# Altium PCB PCB1.PcbDoc
Units mil, origin at the board's own origin, x right, y up, seen from the top; angles counter-clockwise.
Board outline 935 x 1770 mil, 2 copper layers (Top Layer, Bottom Layer); 31 components, 15 nets, 141 pads, 79 vias.
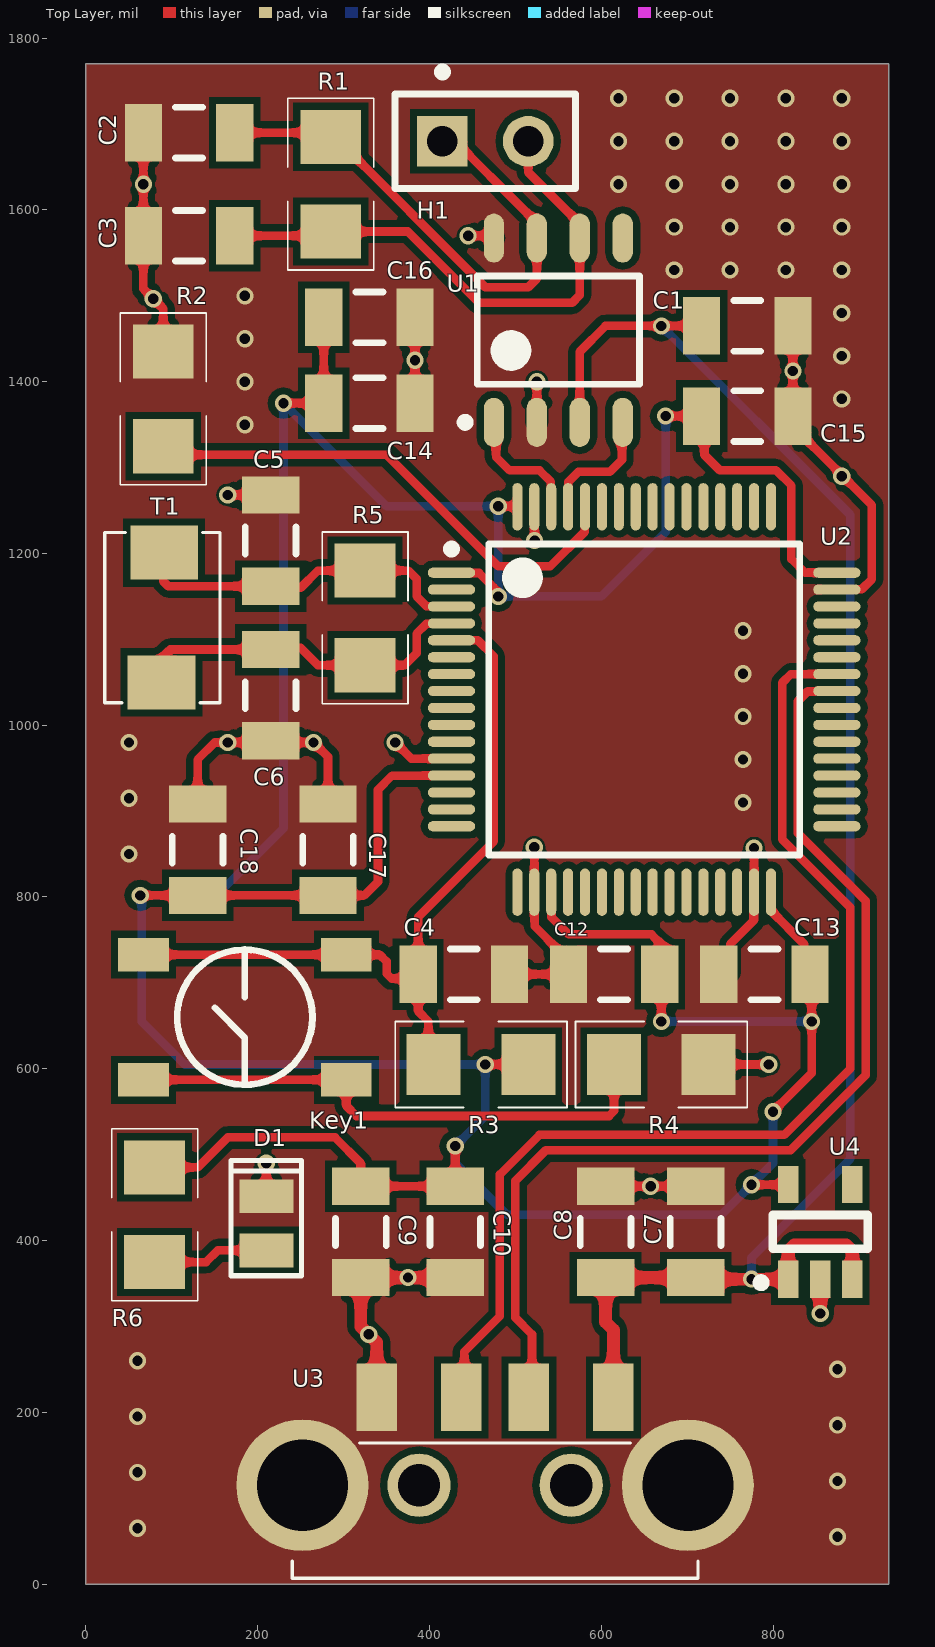
[diagram p0: Top Layer view]
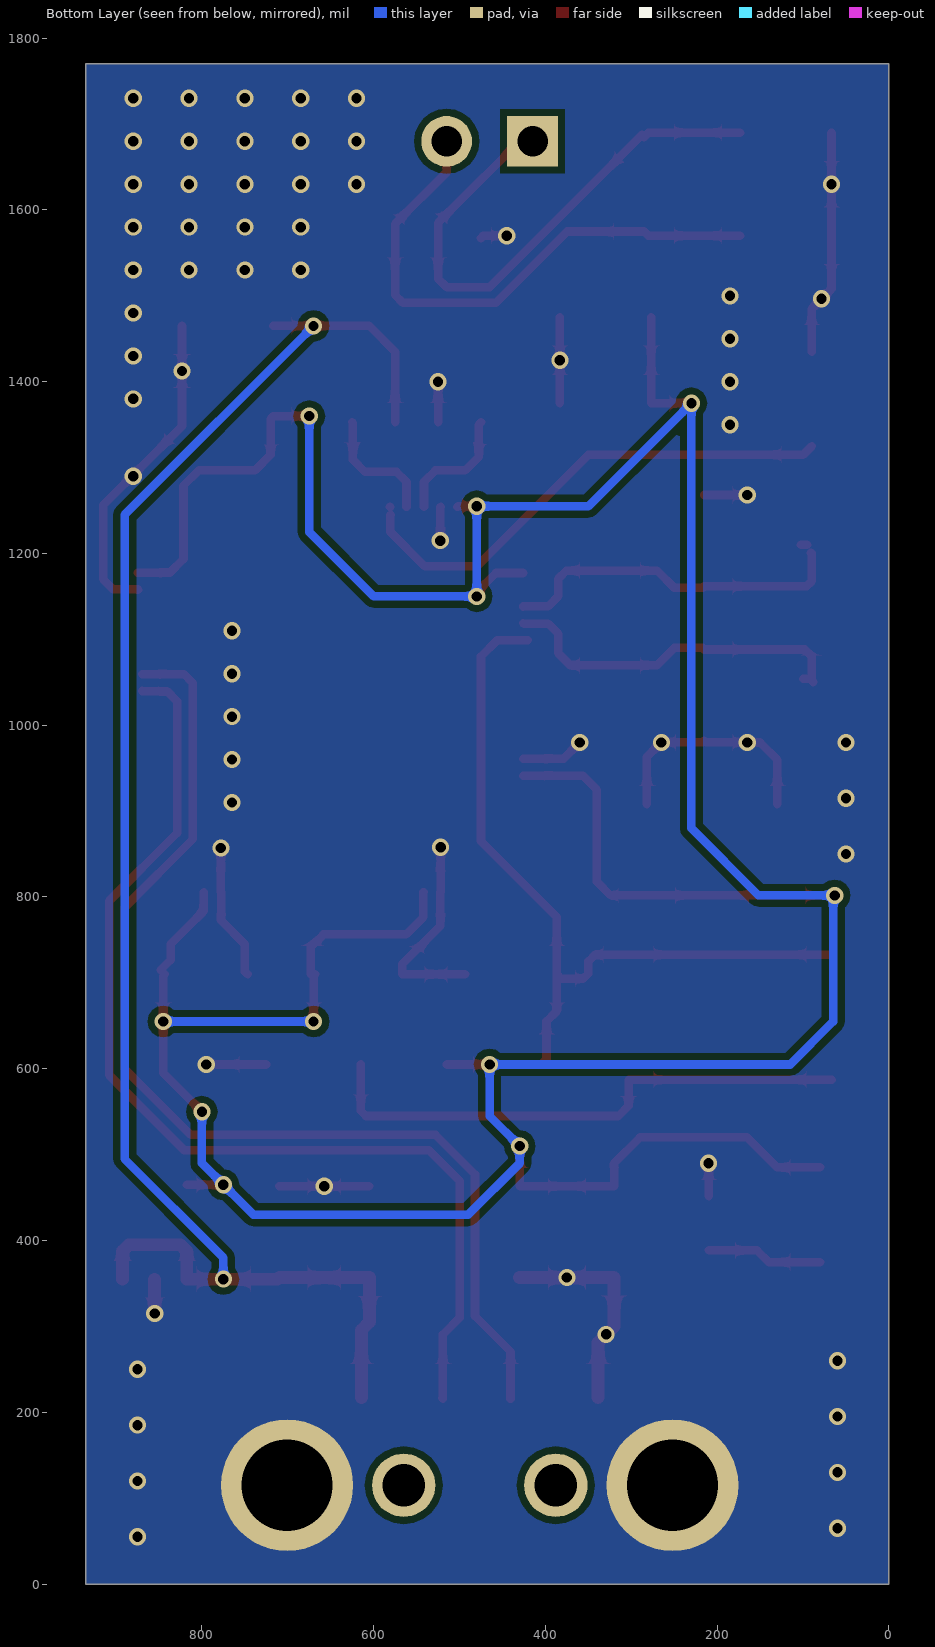
[diagram p1: Bottom Layer view, seen from below]

## Layer stack, top to bottom
Top Solder: solder mask 0.4, Solder Resist, Dk 3.5
Top Layer: signal copper 1.4
Dielectric 1: dielectric 12.6, FR-4, Dk 4.8
Bottom Layer: signal copper 1.4
Bottom Solder: solder mask 0.4, Solder Resist, Dk 3.5

## Board outline
0,0 0,1770 935,1770 935,0

## Design rules (kind name [scope] priority, off if disabled: settings)
Clearance [All] p1: gap=8 ignorepadtopadclearanceinfootprint=TRUE except(0: Arc-Hole Track-Hole SMDPad-Hole THPad-Hole Via-Hole Fill-Hole Poly-Hole Region-Hole Text-Hole)
HoleSize [All] p1: absolutevalues=TRUE maxlimit=500 minlimit=10 maxpercent=80.000 minpercent=20.000
MinimumSolderMaskSliver [All] p1: minsoldermaskwidth=0
PlaneConnect [All] p1: planeconnectstyle=Direct reliefexpansion=20 reliefentries=4 reliefconductorwidth=10 reliefairgap=10
PolygonConnect [All] p1: connectstyle=Direct reliefconductorwidth=10 reliefentries=4 polygonreliefangle="90 Angle" airgapwidth=10
RoutingVias [All] p1: holewidth=28 width=50 viastyle="Through Hole" minholewidth=28 minwidth=50 maxholewidth=28 maxwidth=50
SilkToSilkClearance [All] p1: silktosilkclearance=0
SilkToSolderMaskClearance [IsPad] p1: minsilkscreentomaskgap=0 clearancetoexposedcopper=TRUE
SolderMaskExpansion [All] p1: expansion=4
Width [All] p1: maxlimit=20 minlimit=10 preferedwidth=10
25 further rules are at their usual default settings.

## Components (designator, comment, footprint, x,y, rotation, side; value= is the part's Value field where it differs from the comment)
C1 "0.1uF" C1206 770,1465 r0 top
C2 "30pF" C1206 120,1690 r180 top
C3 "30pF" C1206 120,1570 r180 top
C4 "10uF" C1206 440,710 r180 top
C5 "20pF" C1206 215,1215 r270 top
C6 "20pF" C1206 215,1035 r90 top
C7 "10uF" C1206 710,410 r270 top
C8 "0.1uF" C1206 605,410 r270 top
C9 "10uF" C1206 320,410 r90 top
C10 "0.1uF" C1206 430,410 r90 top
C12 "0.1uF" C1206 615,710 r180 top
C13 "0.1uF" C1206 790,710 r180 top
C14 "0.1uF" C1206 330,1375 r180 top
C15 "0.1uF" C1206 770,1360 r180 top
C16 "4.7uF" C1206 330,1475 r180 top
C17 "1uF" C1206 281.81,855 r90 top
C18 "10nF" C1206 130,855 r90 top
D1 "蓝灯 0805" 0805_LED 210,420 r90 top
H1 "2P" PIN2 415,1680 r0 top
Key1 "KEY" J_TS1187 185,660 r180 top
R1 "120R" R1206 285,1630 r90 top
R2 "10K" R1206 90,1380 r90 top
R3 "10K" R1206 460,605 r0 top
R4 "100R" R1206 670,605 r0 top
R5 "1M" R1206 325,1125 r270 top
R6 "1K 0603" R1206 80,430 r270 top
T1 "C5032" CRYSTAL-SMD-5032 90,1200 r270 top
U1 "TJA1050" TJA1050 550,1460 r90 top
U2 "STM32F103RCT5" TSQFP50P1200X1200X160-64N 650,1030 r0 top
U3 "USB" 0480371000 476.42,131.73 r0 top
U4 "LP5907" SOT-23-5 855,410 r270 top

## Footprints (in the part's own frame and the unit in brackets; to place one, negate y for a bottom-side part, rotate by r counter-clockwise, add the part's x,y. Pads: shape width x height; smd on the part's side, far side on the other; paste and mask are expansions set on the pad)
0805_LED [mm]
  rect 1x1.6 smd: 1(-0.8,0) 2(0.8,0)
  silkscreen extent -1.55,-1.04 1.85,1.04, body extent -1,-0.65 1,0.65, height 1.1
0480371000 [mm]
  rect 1.2x2 smd: 1(-3.5,2.175) 2(-1,2.175) 3(1,2.175) 4(3.5,2.175)
  round 3.9 hole 2.693: MH1(5.7,-0.425) MH4(-5.7,-0.425)
  round 1.875 hole 1.25: MH2(2.25,-0.425) MH3(-2.25,-0.425)
  silkscreen extent -6,-3.18 6,0.82
C1206 [mm] "Chip Capacitor, Body 3.2x1.6mm, IPC High Density"
  rect 1.1x1.7 smd: 1(-1.35,0) 2(1.35,0)
  silkscreen extent -0.4,-0.75 0.4,0.75, body extent -1.7,-0.9 1.7,0.9, height 1.3
CRYSTAL-SMD-5032 [mm]
  rect 1.6x2 smd: 1(-0.025,0.025) 2(3.81,-0.051)
  silkscreen extent -0.62,-1.73 4.42,1.68, body extent -0.62,-1.63 4.38,1.57, height 1.35
J_TS1187 [mm]
  rect 1.5x1 smd: 1(-3,1.85) 1(3,1.85) 2(-3,-1.85) 2(3,-1.85)
  silkscreen extent -2,-2 2,2, body extent -3.5,-2.35 3.5,2.35, height 1.5
PIN2 [mm] "Photosensitive Diode; 2 Leads"
  rect 1.5x1.5 hole 0.9: 1(0,0)
  round 1.5 hole 0.9: 2(2.54,0)
  silkscreen extent -1.4,-1.4 3.94,2.17
R1206 [mm]
  rect 1.6x1.8 smd: 1(-1.4,0) 2(1.4,0)
  silkscreen extent -2.54,-1.27 2.54,1.27, body extent -1.6,-0.81 1.6,0.8, height 1
SOT-23-5 [mm]
  rect 1.1x0.6 smd: 1(1.4,-0.95) 2(1.4,0) 3(1.4,0.95) 4(-1.4,0.95) 5(-1.4,-0.95)
  silkscreen extent -0.5,-1.87 1.62,1.4, body extent -1.25,-1.5 1.25,1.5, height 1.05
TJA1050 [mm] "SOIC, 8-Leads, Body 4.90x3.90mm, Pitch 1.27mm, IPC Medium Density"
  oval 1.45x0.6 smd: 1(-2.725,1.905) 2(-2.725,0.635) 3(-2.725,-0.635) 4(-2.725,-1.905) 5(2.725,-1.905) 6(2.725,-0.635) 7(2.725,0.635) 8(2.725,1.905)
  silkscreen extent -2.85,-2.4 1.6,2.88, body extent -2,-2.4 2,2.4, height 1.75
TSQFP50P1200X1200X160-64N [mm] "TSQFP, 64-Leads, Body 10.00x10.00mm, Pitch 0.50mm, IPC Medium Density"
  oval 1.4x0.3 smd: 1(-5.7,3.75) 2(-5.7,3.25) 3(-5.7,2.75) 4(-5.7,2.25) 5(-5.7,1.75) 6(-5.7,1.25) 7(-5.7,0.75) 8(-5.7,0.25) 9(-5.7,-0.25) 10(-5.7,-0.75) 11(-5.7,-1.25) 12(-5.7,-1.75) 13(-5.7,-2.25) 14(-5.7,-2.75) 15(-5.7,-3.25) 16(-5.7,-3.75) 33(5.7,-3.75) 34(5.7,-3.25) 35(5.7,-2.75) 36(5.7,-2.25) 37(5.7,-1.75) 38(5.7,-1.25) 39(5.7,-0.75) 40(5.7,-0.25) 41(5.7,0.25) 42(5.7,0.75) 43(5.7,1.25) 44(5.7,1.75) 45(5.7,2.25) 46(5.7,2.75) 47(5.7,3.25) 48(5.7,3.75)
  oval 0.3x1.4 smd: 17(-3.75,-5.7) 18(-3.25,-5.7) 19(-2.75,-5.7) 20(-2.25,-5.7) 21(-1.75,-5.7) 22(-1.25,-5.7) 23(-0.75,-5.7) 24(-0.25,-5.7) 25(0.25,-5.7) 26(0.75,-5.7) 27(1.25,-5.7) 28(1.75,-5.7) 29(2.25,-5.7) 30(2.75,-5.7) 31(3.25,-5.7) 32(3.75,-5.7) 49(3.75,5.7) 50(3.25,5.7) 51(2.75,5.7) 52(2.25,5.7) 53(1.75,5.7) 54(1.25,5.7) 55(0.75,5.7) 56(0.25,5.7) 57(-0.25,5.7) 58(-0.75,5.7) 59(-1.25,5.7) 60(-1.75,5.7) 61(-2.25,5.7) 62(-2.75,5.7) 63(-3.25,5.7) 64(-3.75,5.7)
  silkscreen extent -5.82,-4.6 4.6,4.6, body extent -5,-5 5,5, height 1.6

## Part data
C1 C2 C3 C4 C5 C6 C7 C8 C9 C10 C12 C13 C14 C15 C16 C17 C18: library part C, "贴片电容", Package=1206, SuppliersPartNumber=C1868, ComponentLink1Description=供应, ComponentLink1URL=http://www.szlcsc.com/product/details_2220.html, Supplier=LC
D1: library part LED, "发光二极管", Package=0805, SuppliersPartNumber=C2293, ComponentLink1Description=供应, ComponentLink1URL=http://www.szlcsc.com/product/details_2666.html, Supplier=LC
Key1: "按键"
R1 R2 R3 R4 R5 R6: library part R, "贴片电阻"

## Via types
v1: diameter 20, hole 12, Top Layer to Bottom Layer, tented both sides, 79 vias

## Nets (pads, with @x,y where several pads share a name; then routed paths per layer and width w, separated by ;. In a path a pad name is that pad's centre, name@x,y a point inside that pad or via, vN(x,y) a via of type N, cw(c..) or ccw(c..) an arc to the next point about the centre after c; other vN are vias at no path point)
CAN_RX: U1.4 U2.61 | length 146.1
  Top Layer w10: U2.61 561.76,1254.76 561.76,1283.46 573.27,1294.97 609.97,1294.97 624.17,1309.17 624.17,1351.89 U1.4
CAN_TX: U1.1 U2.62 | length 146.4
  Top Layer w10: U1.1 477.61,1350.11 477.61,1312.39 493.27,1296.73 528.12,1296.73 541.39,1283.46 541.39,1254.76 U2.62
GND: C1.2 C2.2 C3.2 C4.1 C5.1 C6.1 C7.1 C8.1 C9.1 C10.1 C12.2 C13.2 C14.1 C15.1 C16.1 C17.2 C18.2 D1.2 R2.2 R4.2 U1.2 U1.8 U2.12 U2.18 U2.31 U2.47 U2.63 U3.1 U3.MH1 U3.MH4 U4.2 | length 2170.6
  Top Layer w10: C2.2 v1(66.85,1630) C3.2 66.85,1508.15 90,1485 R2.2 ; C18.2 130,960 150,980 v1(165,980) 213.15,980 C6.1 216.85,980 v1(265,980) 281.81,963.19 C17.2 ; v1(165,1268.15) C5.1 ; D1.2 v1(210,490) ; v1(360,980) 378.9,961.1 U2.12 ; C14.1 v1(383.15,1425) C16.1 ; v1(445,1570) 472.28,1570 U1.8 ; C4.1 C12.2 566.85,710 566.85,721.81 522.39,766.27 522.39,805.24 U2.18 v1(522.05,857.95) ; U2.63 522.39,1254.06 v1(522.39,1215) ; U1.2 v1(525,1400) ; C8.1 v1(657.5,463.15) C7.1 ; R4.2 v1(795,605) ; C13.2@746.85,710 750,713.15 750,745 777.61,772.61 777.61,805.24 U2.31 v1(777.95,857.05) ; C1.2 v1(823.15,1412.5) C15.1 823.15,1348.19 914.97,1256.37 914.97,1169.81 903.46,1158.3 874.76,1158.3 U2.47
  Top Layer w15: U3.1 338.62,281.38 v1(329.31,290.69) 320,300 C9.1 v1(375,356.85) C10.1 ; v1(855,315) U4.2
  other v1: 875,55 60,65 875,120 60,130 875,185 60,195 875,250 60,260 50,850 765,910 50,915 765,960 50,980 765,1010 765,1060 765,1110 880,1290 185,1350 880,1380 185,1400 880,1430 185,1450 880,1480 78.43,1496.57 185,1500 685,1530 750,1530 815,1530 880,1530 685,1580 750,1580 815,1580 880,1580 620,1630 685,1630 750,1630 815,1630 880,1630 620,1680 685,1680 750,1680 815,1680 880,1680 620,1730 685,1730 750,1730 815,1730 880,1730
NetC2_1: C2.1 H1.1 R1.2 U1.7 | length 649.8
  Top Layer w10: C2.1 280.12,1690 R1.2 R1.2@285.12,1685 ; R1.2@287.5,1687.5 465,1510 515,1510 525,1520 U1.7 525,1585 H1.1@415,1695
NetC3_1: C3.1 H1.2 R1.1 U1.6 | length 660.9
  Top Layer w10: C3.1 280.12,1570 R1.1 374.66,1574.88 457.54,1492 566.14,1492 575,1500.86 U1.6 575,1584.02 515,1644.02 H1.2@515,1695
NetD1_1: D1.1 R6.2 | length 135.6
  Top Layer w10: R6.2 139.88,374.88 153.5,388.5 D1.1
NetKey1_1: Key1.1 R4.1 | length 639.8
  Top Layer w10: Key1.1@66.89,587.17 303.11,587.17 303.11,556.89 315,545 609.02,545 614.88,550.86 R4.1
NetR2_1: R2.1 U2.60 | length 585.7
  Top Layer w10: R2.1 99.88,1315 350,1315 480,1185 540.4,1185 580.76,1225.36 580.76,1244.57 U2.60@580.32,1245 ; U2.60@580.76,1254.06 U2.60
OSC_IN: C5.2 R5.1 T1.1 U2.3 | length 418
  Top Layer w10: T1.1 90,1200 90,1167.71 95.86,1161.85 C5.2 216.85,1160 250,1160 270.12,1180.12 R5.1 375.43,1180.12 385.03,1170.52 385.03,1150.12 396.54,1138.61 425.24,1138.61 U2.3 ; T1.1@95,1210 T1.1@102.87,1210
OSC_OUT: C6.2 R5.2 T1.2 U2.4 | length 420.3
  Top Layer w10: T1.2 90,1052 90,1080 98.15,1088.15 C6.2 216.85,1090 250,1090 270.12,1069.88 R5.2 371.03,1069.88 385,1083.85 385,1106.7 396.54,1118.24 425.24,1118.24 U2.4 ; T1.2@92,1054 T1.2@99.87,1054
RESET: C4.2 Key1.2 R3.1 U2.5 | length 923.1
  Top Layer w10: Key1.2@66.89,732.83 303.11,732.83 342.17,732.83 350,725 350,710.86 355.86,705 381.85,705 C4.2 ; R3.1 398.7,611.18 398.7,655 386.85,666.85 386.85,705 C4.2 ; U2.5@420.59,1098.9 456.1,1098.9 475,1080 475,865 386.85,776.85 C4.2
USB_DN: U2.41 U3.3 | length 1235.3
  Top Layer w10: U3.3@520,216.26 519.37,215.63 519.37,290.63 500,310 500,469.54 535.46,505 820.46,505 907.8,592.35 907.8,795.58 828.85,874.53 828.85,1027.99 840.36,1039.5 869.06,1039.5 U2.41@869.41,1039.84
USB_DP: U2.42 U3.2 | length 1279.5
  Top Layer w10: U3.2@440.63,215.63 440.63,270.63 482,312 482,477 528,523 813,523 889.8,599.8 889.8,788.12 810.85,867.08 810.85,1049.52 820.86,1059.53 837.88,1059.53 ; 840.72,1059.53 U2.42@869.41,1059.53
VCC3V3: C9.2 C10.2 C12.1 C13.1 C14.2 C15.2 C16.2 C17.1 C18.1 R3.2 R6.1 U2.1 U2.13 U2.19 U2.32 U2.48 U2.64 U4.5 | length 4980.2
  Top Layer w10: v1(63.15,801.85) C18.1 C17.1 324.14,801.85 340,817.71 340,925 356.42,941.42 424.9,941.42 425.24,941.07 U2.13 ; R6.1 130.12,485.12 165,520 290,520 320,490 C9.2 C10.2 v1(430,510) ; v1(230,1375) C14.2 C16.2 ; U2.1 425.94,1177.29 457.71,1177.29 480,1155 v1(480,1150) ; v1(465,605) R3.2 ; v1(480,1255) 501.77,1255 U2.64 ; U2.19 542.08,805.24 542.08,776.54 562.15,756.46 658.54,756.46 673.15,741.85 C12.1@673.15,710 ; C12.1 670,708.15 v1(670,655) ; v1(675,1360) C15.2 720,1356.85 720,1315 737.98,1297.02 803.42,1297.02 821.4,1279.04 821.4,1193.57 837.33,1177.64 U2.48 ; v1(775,465) 817.48,465 U4.5 ; U2.32 797.64,783.94 836.5,745.08 836.5,726.65 C13.1@848.15,715 ; v1(800,550) 845,595 v1(845,655) 845,708.15 C13.1
  Bottom Layer w10: v1(670,655) v1(845,655) ; v1(675,1360) 675,1225 600,1150 v1(480,1150) v1(480,1255) 350,1255 v1(230,1375) 230,880 151.85,801.85 v1(63.15,801.85) 65,800 65,655 115,605 v1(465,605) 465,545 v1(430,510) 430,490 490,430 740,430 v1(775,465) 800,490 v1(800,550)
VCC5V: C1.1 C7.2 C8.2 U1.3 U3.4 U4.1 U4.3 | length 1988.4
  Top Layer w10: U1.3 575,1435 605,1465 v1(670,1465) C1.1 ; C7.2 C7.2@711.97,354.88
  Top Layer w15: U3.4 614.21,295.79 605,305 C8.2 C7.2 ; C7.2@711.97,354.88 U4.1 817.6,387.6 825,395 885,395 892.4,387.6 U4.3
  Bottom Layer w10: v1(670,1465) 890,1245 890,495 775,380 v1(775,355)
pads on no net: U1.5 U2.2 U2.6 U2.7 U2.8 U2.9 U2.10 U2.11 U2.14 U2.15 U2.16 U2.17 U2.20 U2.21 U2.22 U2.23 U2.24 U2.25 U2.26 U2.27 U2.28 U2.29 U2.30 U2.33 U2.34 U2.35 U2.36 U2.37 U2.38 U2.39 U2.40 U2.43 U2.44 U2.45 U2.46 U2.49 U2.50 U2.51 U2.52 U2.53 U2.54 U2.55 U2.56 U2.57 U2.58 U2.59 U3.MH2 U3.MH3 U4.4

## Polygon pours and split planes (outlines as drawn)
GND on Top Layer (solid, pour order 6): 0,1770 935,1770 935,0 0,0
GND on Bottom Layer (solid, pour order 8): 0,1770 935,1770 935,0 0,0

## Silkscreen, mask and mechanical layers (free items; w line width, h text height)
Mechanical 1:
  the board outline again, w0.5